# EAGLE board NatzMunny (EAGLE 5.04)
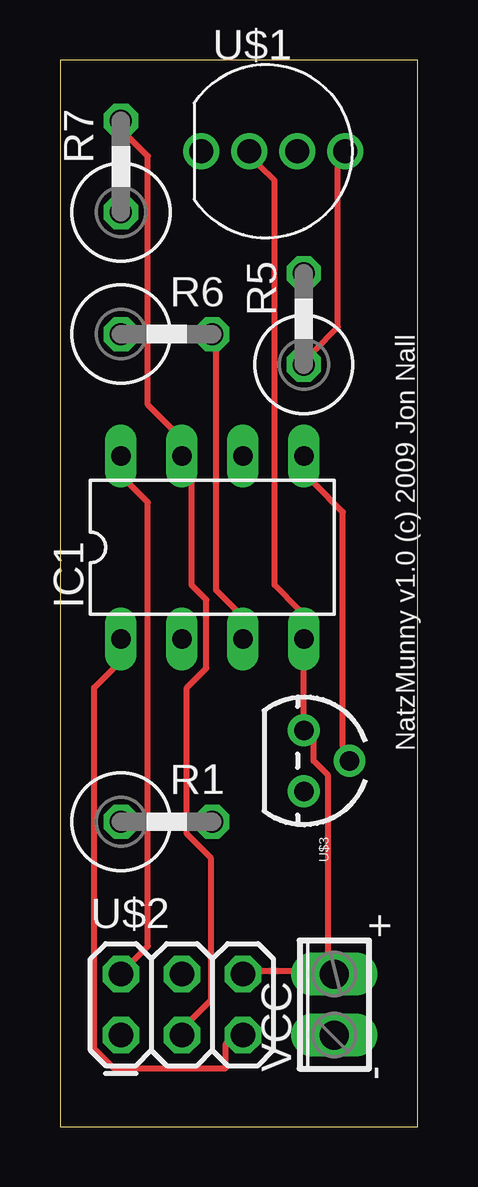
[diagram p0: board, top side]
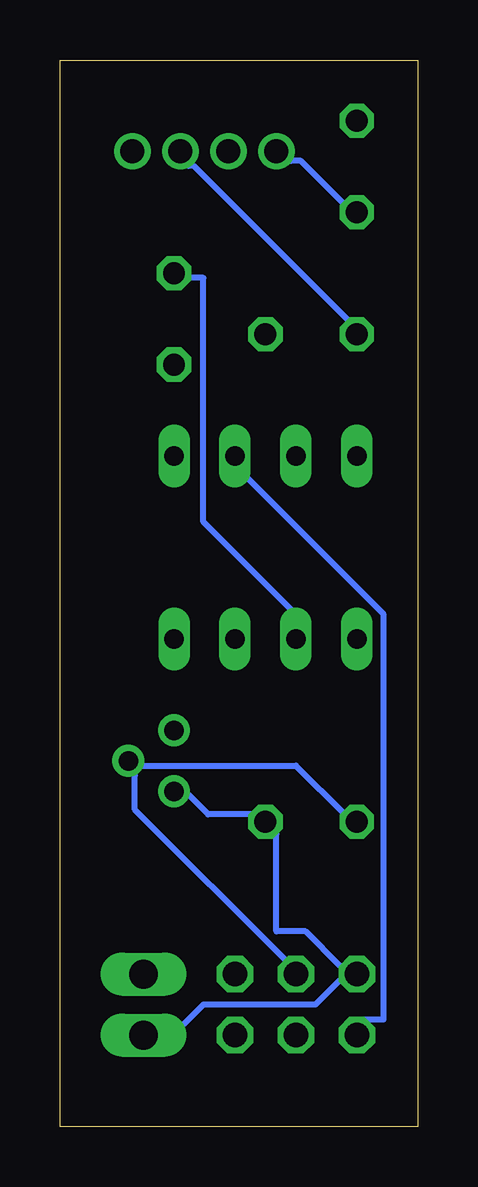
[diagram p1: board, bottom side, seen from below]

Size 14.91 x 44.44 mm. Coordinates in mm from the lower left corner, seen from the top.
Outline: 0,0 14.91,0 14.91,44.44 0,44.44 0,0
Copper layers (1*16): Top 0.035mm / dielectric 1.5mm / Bottom 0.035mm
Design rules "default": minimum track width 10mil, minimum drill 24mil, track to track 8mil, track to pad 8mil, pad to pad 8mil, via to via 8mil, smd to smd 8mil, copper to edge 40mil, drill to drill 8mil, minimum pad ring 10mil, minimum via ring 8mil, stop-mask expansion 4mil, vias tented up to drill 0mil, thermal gap 10mil

## Footprints (pad centres in the part's own frame; a part is rotated, then mirrored left to right if it is on the bottom)
DIL08 = drill 0.813 long: 1 -3.81,-3.81; 2 -1.27,-3.81; 3 1.27,-3.81; 4 3.81,-3.81; 5 3.81,3.81; 6 1.27,3.81; 7 -1.27,3.81; 8 -3.81,3.81
0411V = drill 0.914 octagon: 1 -2.54,0; 2 1.27,0
LED-TRICOLOR-THROUGHHOLE = drill 1 round: BLU 1,0; GND -1,0; GRN 3,0; RED -3,0
2X3 = drill 1.016 octagon: 1 0,0; 2 0,2.54; 3 2.54,0; 4 2.54,2.54; 5 5.08,0; 6 5.08,2.54
TO-92 = drill 0.813 round: 1 -1.27,0; 2 0,1.905; 3 1.27,0
2POL254 = drill 1.2 long: 1 -1.27,0; 2 1.27,0

## Placement (x,y rotation side)
IC1  TINY13-20PU  [DIL08]  6.35,24.13 0 top
R1  4.7k  [0411V]  5.08,12.7 0 top
R5  320  [0411V]  10.16,34.29 90 top
R6  320  [0411V]  5.08,33.02 0 top
R7  320  [0411V]  2.54,40.64 90 top
U$1  LED-TRICOLOR-THROUGHHOLE  [LED-TRICOLOR-THROUGHHOLE]  8.89,40.64 0 top
U$2  AVR_SPI_PRG_6PTH  [2X3]  2.54,3.81 0 top
U$3  DS18B20  [TO-92]  10.16,15.24 270 top
VCC  Power  [2POL254]  11.43,5.08 90 top

## Library data of the parts
IC1 = atmel
R1 R5-R7 = resistor
U$1 U$2 = SparkFun
U$3 = nall
VCC = con-phoenix-254

## Nets
GND: IC1.4 U$1.GND U$2.6 U$3.1 VCC.2
N$1: R5.1 U$1.GRN
N$2: R6.1 U$1.BLU
N$3: R7.1 U$1.RED
N$4: IC1.7 R7.2 U$2.3
N$5: IC1.3 R6.2
N$6: IC1.2 R5.2
N$9: IC1.5 R1.1 U$2.4 U$3.2
N$10: IC1.6 U$2.1
N$11: IC1.1 U$2.5
VDD: IC1.8 R1.2 U$2.2 U$3.3 VCC.1

## Tracks (layer width: path | path; a pad name or v marks a point on that pad's centre or on a via)
GND
  Top 0.254: U$2.6 8.33,6.5 9.75,6.5 VCC.2 11.18,7.11 11.18,14.63 10.57,15.24 10.57,16.05 U$3.1 IC1.4 9.96,21.54 8.94,22.55 8.94,39.42 8.33,40.03 U$1.GND
N$1
  Top 0.254: R5.1 10.57,32.31 11.58,33.33 11.58,40.03 U$1.GRN
N$2
  Bottom 0.254: R6.1 2.85,33.53 9.35,40.03 9.55,40.03 U$1.BLU
N$3
  Bottom 0.254: R7.1 3.05,38.41 4.88,40.23 5.28,40.23 U$1.RED
N$4
  Top 0.254: R7.2 2.85,41.25 3.66,40.44 3.66,30.07 4.67,29.06 IC1.7 5.49,26.82 5.49,22.55 6.1,21.95 6.1,19.1 5.28,18.29 5.28,12.19 6.3,11.18 6.3,5.28 5.49,4.47 U$2.3
N$5
  Top 0.254: IC1.3 7.32,21.54 6.5,22.35 6.5,32.51 R6.2
N$6
  Bottom 0.254: IC1.2 5.28,21.54 8.94,25.2 8.94,35.36 9.55,35.36 R5.2
N$9
  Top 0.254: IC1.5 10.57,26.82 11.79,25.6 11.79,15.85 U$3.2
  Bottom 0.254: R1.1 3.05,13.01 5.08,15.04 11.58,15.04 U$3.2 11.79,14.63 11.79,13.21 5.49,6.91 U$2.4
N$10
  Bottom 0.254: IC1.6 7.11,27.03 1.42,21.34 1.42,4.47 2.23,4.47 U$2.1
N$11
  Top 0.254: IC1.1 2.23,19.1 1.42,18.29 1.42,3.25 2.23,2.44 6.91,2.44 6.91,3.45 U$2.5
VDD
  Top 0.254: IC1.8 2.85,26.82 3.66,26.01 3.66,7.52 3.05,6.91 U$2.2
  Bottom 0.254: U$3.3 9.55,13.82 8.74,13.01 6.91,13.01 R1.2 5.89,12.19 5.89,8.13 4.67,8.13 3.25,6.71 U$2.2 3.25,6.1 4.27,5.08 8.94,5.08 9.75,4.27 VCC.1

## Text on the board
tPlace: NatzMunny v1.0 (c) 2009 Jon Nall | + | -